# Altium PCB ZooidReceiverPCB.PcbDoc
Units mm, origin at the board's own origin, x right, y up, seen from the top; angles counter-clockwise.
Board outline 35 x 15 mm, 4 copper layers (Component Side, Power Plane, Ground Plane, Solder Side), stack 1.1 mm thick; 45 components, 37 nets, 189 pads, 88 vias.
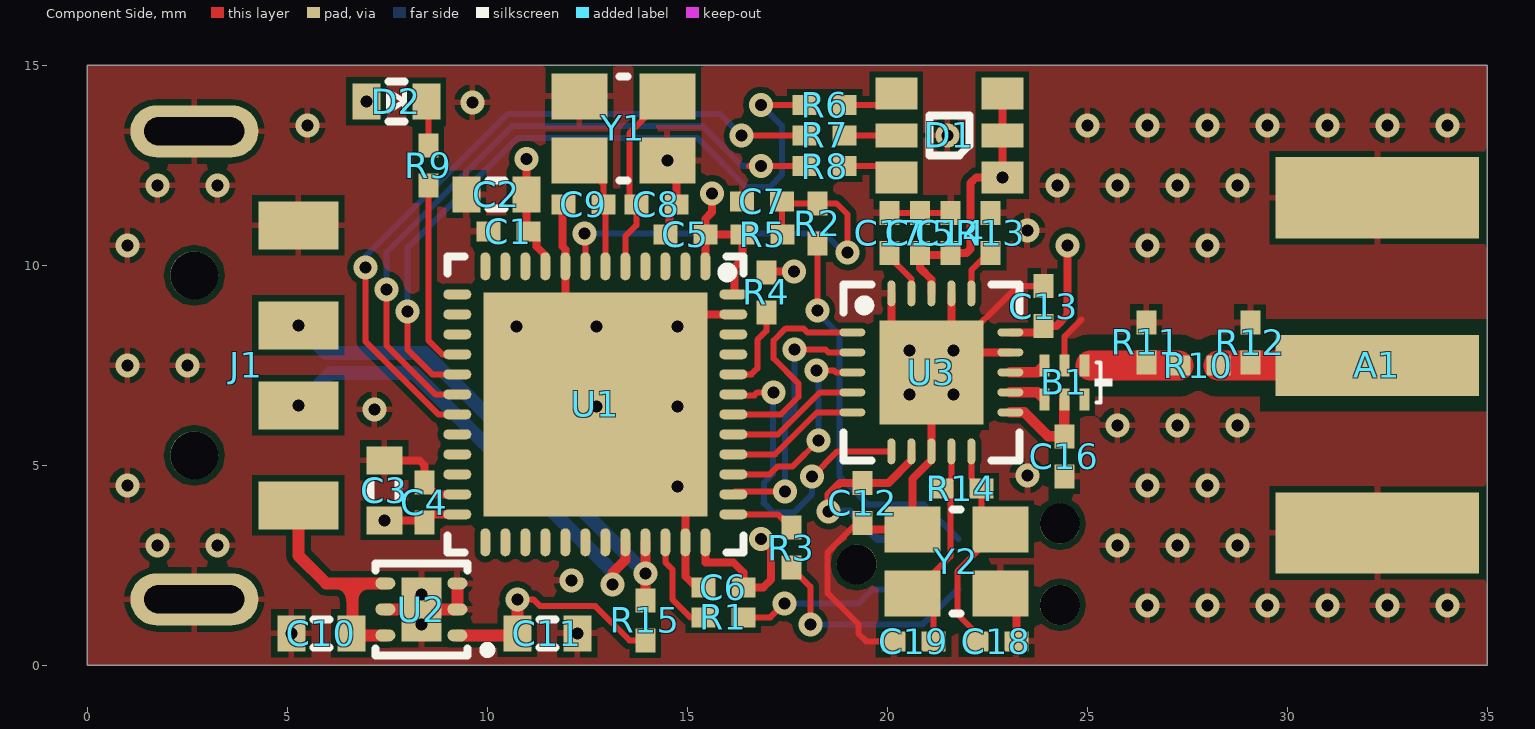
[diagram p0: Component Side view]
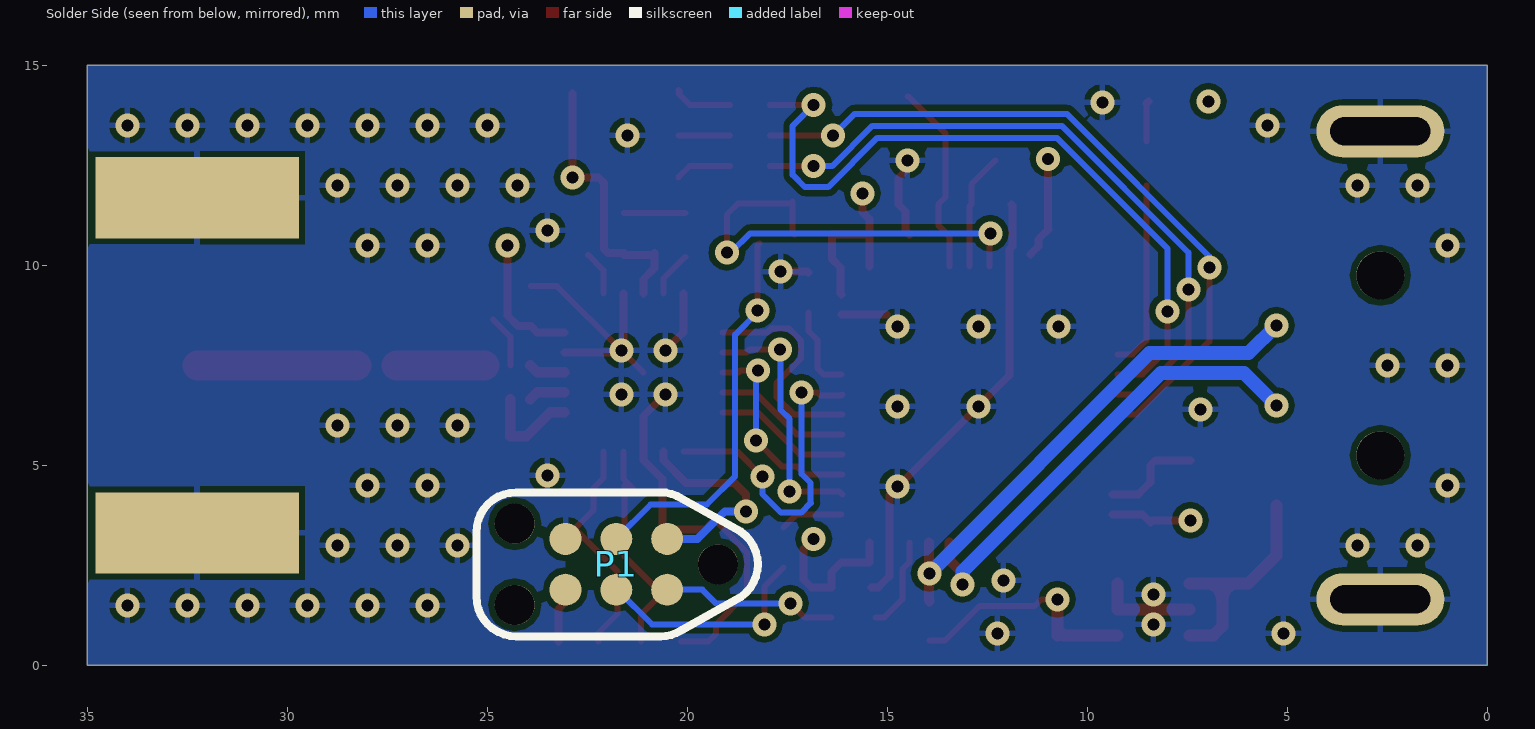
[diagram p1: Solder Side view, seen from below]
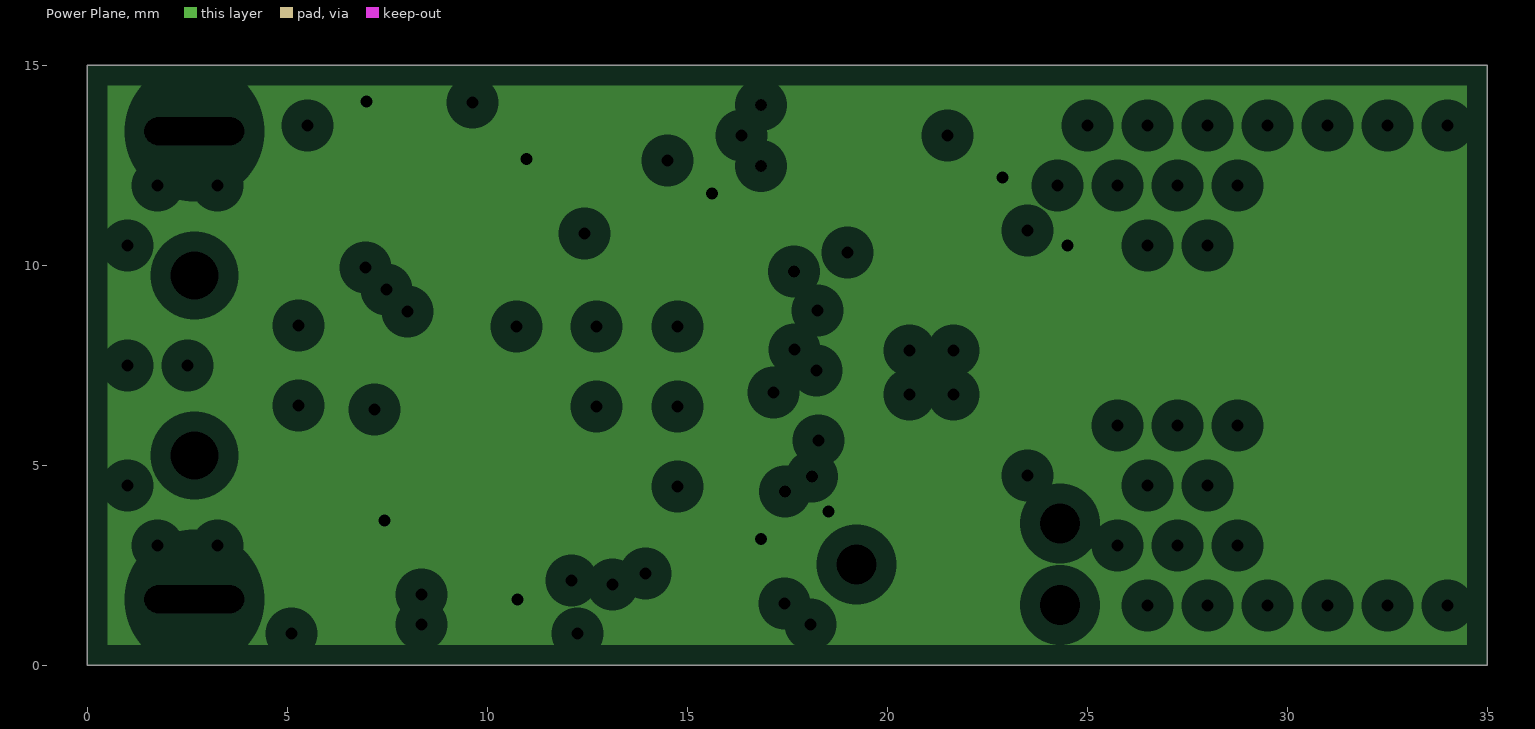
[diagram p2: Power Plane, clearances drawn from the general rule]
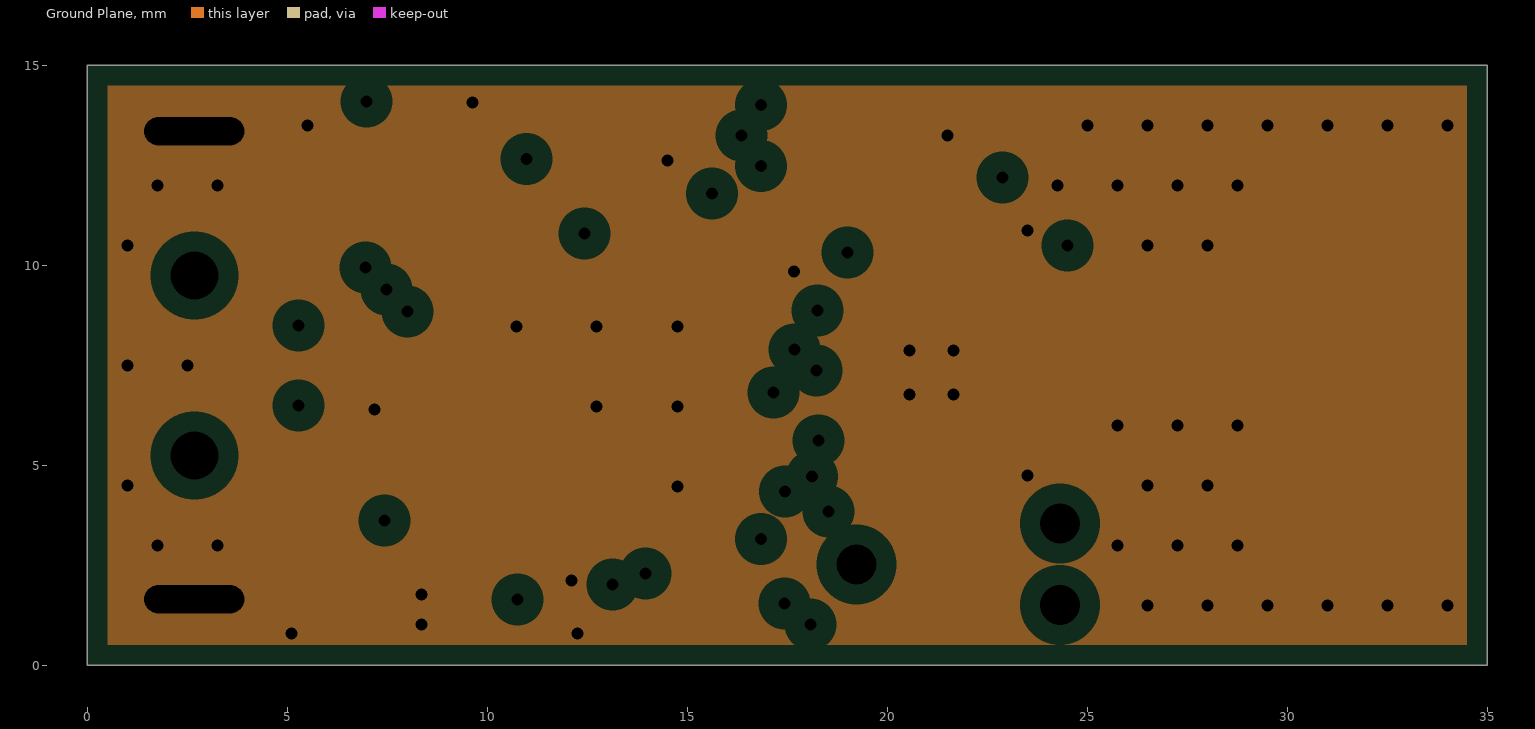
[diagram p3: Ground Plane, clearances drawn from the general rule]

## Layer stack, top to bottom
Component Side: signal copper 0.035
Dielectric 1: prepreg 0.3, FR-4, Dk 4.2
Power Plane: plane copper 0.035, net +3.3V
Dielectric 3: prepreg 0.36, FR-4, Dk 4.2
Ground Plane: plane copper 0.035, net GND
Dielectric 4: prepreg 0.3, FR-4, Dk 4.2
Solder Side: signal copper 0.035

## Board outline
0,0 0,15 35,15 35,0

## Design rules (kind name [scope] priority, off if disabled: settings)
Clearance Clearance_Antenna [InNet('NetA1_1') Or InNet('NetB1_1') vs isRegion] p1: gap=0.4
Clearance Clearance_1 [All] p2: gap=0.15
ComponentClearance [All] p1: gap=0.15 collisioncheckmode=3 verticalgap=0.254 showdistances=FALSE
DiffPairsRouting DiffPairsRouting_USB [InNetClass('USB')] p1: maxlimit=0.254 minlimit=0.15 mostfreqgap=0.254 toplayer_mingap=0.254 toplayer_minwidth=0.2 toplayer_maxwidth=0.3 toplayer_prefwidth=0.381 bottomlayer_maxgap=0.17 bottomlayer_prefgap=0.15 bottomlayer_minwidth=0.2 bottomlayer_maxwidth=0.54 bottomlayer_prefwidth=0.35 maxuncoupledlength=12.7
DiffPairsRouting [All] p2: maxlimit=10 minlimit=0.15 mostfreqgap=0.2 toplayer_minwidth=0.15 toplayer_maxwidth=0.6 toplayer_prefwidth=0.2 bottomlayer_minwidth=0.15 bottomlayer_maxwidth=0.6 bottomlayer_prefwidth=0.2 maxuncoupledlength=12.7
FabricationTestPointUsage FabricationTestPointUsage_1 [All] p1: valid=0 allowmultiple=FALSE
FabricationTestpoint FabricationTestpoint_1 [All] p1: side=3 testpointundercomponent=TRUE minsize=1.016 maxsize=2.54 preferedsize=1.524 minholesize=0 maxholesize=1.016 preferedholesize=0.813 testpointgrid=0.025 allowsidetop=TRUE allowsidebottom=TRUE usegrid=TRUE gridtolerance=0
HoleSize [All] p1: absolutevalues=TRUE maxlimit=6 minlimit=0.2 maxpercent=80.000 minpercent=20.000
HoleSize FabricationTestpoint [All] p2 off: absolutevalues=TRUE maxlimit=2.54 minlimit=0.025 maxpercent=80.000 minpercent=20.000
HoleSize FabricationTestPointUsage [All] p3 off: absolutevalues=TRUE maxlimit=2.54 minlimit=0.025 maxpercent=80.000 minpercent=20.000
MatchedLengths MatchedLengths_USB [InNetClass('USB')] p1: tolerance=0.15 checknetsindiffpair=TRUE checkdiffpairvsdiffpair=TRUE checkothers=TRUE
MaxMinImpedance [InNetClass('USB')] p1: minimum=89.00 maximum=91.00
MinimumSolderMaskSliver [All] p1: minsoldermaskwidth=0.01
PlaneClearance [All] p1: clearance=0.5
PlaneConnect [All] p1: planeconnectstyle=Relief reliefexpansion=0.4 reliefentries=4 reliefconductorwidth=0.15 reliefairgap=0.15
PolygonConnect [All] p1: connectstyle=Relief reliefconductorwidth=0.15 reliefentries=4 polygonreliefangle="90 Angle" airgapwidth=0.15
RoutingCorners [All] p1: cornerstyle=45-Degree minsetback=1.25 maxsetback=1.25
RoutingVias [All] p1: holewidth=0.3 width=0.6 viastyle="Through Hole" minholewidth=0.3 minwidth=0.6 maxholewidth=0.3 maxwidth=0.6
SilkToBoardRegionClearance [All] p1 off:
SilkToSilkClearance [All] p1: silktosilkclearance=0.1
SilkToSolderMaskClearance [IsPad] p1: minsilkscreentomaskgap=0.1 clearancetoexposedcopper=TRUE
SolderMaskExpansion [All] p1: expansion=0.075
UnpouredPolygon [All] p1: allowunpoured=FALSE
Width Width_USB [InNetClass('USB')] p1: maxlimit=0.107 minlimit=0.098 preferedwidth=0.103 impedancedriven=TRUE minimp=89.000000 maximp=91.000000 favimp=90.000000 checkconnectedcopper=TRUE
Width [All] p2: maxlimit=1 minlimit=0.15 preferedwidth=0.2 minimp=50.000000 maximp=50.000000 favimp=50.000000
17 further rules are at their usual default settings.

## Classes and differential pairs
net class USB: USB_D_N USB_D_P
component class SRMicrocontroller: C1 C2 C3 C4 C5 C6 C7 C8 C9 P1 R1 R2 R3 R4 R5 U1 Y1
component class SRPeripherals: C10 C11 D1 D2 J1 R6 R7 R8 R9 R15 U2
component class SRRadio: A1 B1 C12 C13 C14 C15 C16 C17 C18 C19 R10 R11 R12 R13 R14 U3 Y2
net class RGBLED[1..3]: RGBLED1 RGBLED2 RGBLED3
differential pair USB_D: +USB_D_P -USB_D_N

## Components (designator, comment, footprint, x,y, rotation, side; value= is the part's Value field where it differs from the comment)
A1 "142-4701-801" 142-4701-801 32.25,7.5 r270 top
B1 "2450BM14A0002T" 2450BM14A0002 24.425,7.075 r0 top
C1 "10nF" 0402 10.525,10.85 r0 top
C2 "1uF" 0603 10.225,11.775 r0 top
C3 "4.7uF" 0603 7.425,4.375 r270 top
C4 "100nF" 0402 8.425,4.075 r270 top
C5 "100nF" 0402 14.95,10.775 r0 top
C6 "100nF" 0402 15.9,1.95 r0 top
C7 "100nF" 0402 16.87,11.6 r0 top
C8 "22pF" 0402 14.225,11.525 r180 top
C9 "22pF" 0402 12.4,11.525 r0 top
C10 "1uF" 0603 5.85,0.8 r0 top
C11 "1uF" 0603 11.5,0.8 r180 top
C12 "100nF" 0402 19.38,4.06 r90 top
C13 "100nF" 0402 23.91,8.98 r270 top
C14 "10nF" 0402 21.58,10.81 r270 top
C15 "1nF" 0402 20.82,10.81 r270 top
C16 "2.2nF" 0402 24.425,5.225 r90 top
C17 "33nF" 0402 20.05,10.81 r270 top
C18 "22pF" 0402 22.725,0.6 r180 top
C19 "22pF" 0402 20.66,0.6 r0 top
D1 "SMLVN6RGB1W1" "3.5x2.8 mm 6-SMD" 21.55,13.25 r180 top
D2 "BLUE LED" "0603 - LED" 7.725,14.1 r0 top
J1 "48037-2200" 48037-2200 5.275,7.5 r270 top locked
P1 "TC2030-IDC-NL" TC2030-IDC-NL 21.775,2.525 r0 bottom
R1 "22R" 0402 15.9,1.2 r0 top
R2 "22R" 0402 18.25,11.05 r270 top
R3 "22R" 0402 17.6,2.94 r270 top
R4 "100K" 0402 16.975,9.325 r270 top
R5 "100K" 0402 16.88,10.77 r180 top
R6 "22.6R" 0402 18.43,14.01 r0 top
R7 "130R" 0402 18.43,13.25 r0 top
R8 "24.9R" 0402 18.43,12.48 r0 top
R9 "22R" 0402 8.525,12.5 r90 top
R10 "0R" 0402 27.775,7.5 r0 top
R11 "0402-NC" "0402 - NOBODY" 26.475,8.075 r270 top
R12 "0402-NC" "0402 - NOBODY" 29.075,8.075 r270 top
R13 "22K 0402 1/16W ±1%" 0402 22.58,10.81 r270 top
R14 "1M" 0402 21.85,4.42 r180 top
R15 "1.5K" 0402 13.95,1.125 r270 top
U1 "STM32F103CBU6" QFN50P700X700X60_HS-49L 12.7,6.525 r270 top
U2 "ADP122ACPZ-3.3-R7" "LFCSP-6 2.0X2.0X0.55" 8.35,1.4 r90 top
U3 "nRF24L01+" QFN50P400X400X95_HS-21L 21.1,7.325 r0 top
Y1 "7V-16.000MAAE-T" "3.2x2.5 CRYSTAL" 13.4,13.425 r180 top
Y2 "7V-16.000MAAE-T" "3.2x2.5 CRYSTAL" 21.725,2.6 r0 top

## Footprints (in the part's own frame and the unit in brackets; to place one, negate y for a bottom-side part, rotate by r counter-clockwise, add the part's x,y. Pads: shape width x height; smd on the part's side, far side on the other; paste and mask are expansions set on the pad)
"3.2x2.5 CRYSTAL" [mm]
  rect 1.4x1.15 smd: 1(-1.1,-0.8) 2(1.1,-0.8) 3(1.1,0.8) 4(-1.1,0.8)
  silkscreen extent -0.1,-1.3 0.1,1.3, body extent -1.6,-1.25 1.6,1.25, height 0.8
"3.5x2.8 mm 6-SMD" [mm] "3.5 x 2.8 mm 6-SMD Flat Leads"
  rect 1.05x0.8 smd: 1(-1.325,1.05) 3(-1.325,-1.05) 4(1.325,-1.05) 6(1.325,1.05)
  rect 1.05x0.6 smd: 2(-1.325,0) 5(1.325,0)
  silkscreen extent -0.5,-0.5 0.5,0.5, body extent -1.75,-1.4 1.75,1.4, height 0.6
142-4701-801 [mil]
  rect 60x200 smd: 1(0,0)
  rect 80x200 smd: 2(-165,0) 2(165,0)
  rect 80x200 smd far side: 2(-165,0) 2(165,0)
  body extent -187,-85 187,477, height 171
0402 [mm] "Chip Body 1.0 x 0.5 mm (LxW typ)"
  rect 0.6x0.5 smd: 1(-0.5,0) 2(0.5,0)
  body extent -0.55,-0.3 0.55,0.3, height 0.55
"0402 - NOBODY" [mm] "Chip Body 1.0 x 0.5 mm (LxW typ)"
  rect 0.6x0.5 smd: 1(-0.5,0) 2(0.5,0)
  body extent -0.55,-0.3 0.55,0.3, height 0
0603 [mm] "Chip Body 1.6 x 0.8 mm (LxW typ)"
  rect 0.7x0.9 smd: 1(-0.75,0) 2(0.75,0)
  silkscreen extent -0.2,-0.35 0.2,0.35, body extent -0.85,-0.48 0.85,0.48, height 0.9
"0603 - LED" [mm] "Chip Body 1.6 x 0.8 mm (LxW typ)"
  rect 0.7x0.9 smd: 1(-0.75,0) 2(0.75,0)
  silkscreen extent -0.2,-0.5 0.2,0.5, body extent -0.85,-0.48 0.85,0.48, height 0.9
2450BM14A0002 [mm] "2.45 GHz Impedance Matched Balun-Filter: Optimized for Nordic's Chipset nRF24L01"
  rect 0.25x0.55 smd: 1(0.5,0.425) 2(0,0.425) 3(-0.5,0.425) 4(-0.5,-0.425) 5(0,-0.425) 6(0.5,-0.425)
  silkscreen extent 0.75,-0.5 1.2,0.5, body extent -0.8,-0.4 0.8,0.4, height 0.6
48037-2200 [mm] "Molex 48037-2200 USB Type A Receptacle"
  rect 1.2x2 smd: 1(3.5,0) 2(1,0) 3(-1,0) 4(-3.5,0)
  oval 1.3x3.2 hole 0.7 slot 2.5 at 90 deg: 5(-5.85,-2.6) 5(5.85,-2.6)
  round 1.2 hole 1.2 paste+0 mask+0: MH1(-2.25,-2.6) MH2(2.25,-2.6)
  body extent -6.02,-20.35 6.03,0.6, height 2.1
"LFCSP-6 2.0X2.0X0.55" [mm] ". 6-Lead Lead Frame Chip Scale Package [LFCSP_UD]  2.00 mm× 2.00 mm Body, Ultra Thin, Dual Lead  (CP-6-3)"
  oval 0.3x0.5 smd: 1(-0.65,-0.9) 2(0,-0.9) 3(0.65,-0.9) 4(0.65,0.9) 5(0,0.9) 6(-0.65,0.9)
  rect 1.6x1 smd: 7(0,0)
  silkscreen extent -1.15,-1.75 1.15,1.15, body extent -1,-1 1,1, height 0.6
QFN50P400X400X95_HS-21L [mm] "QFN, 20-Leads, Body 4,00x4,00mm, Pitch 0,50mm, Thermal Pad 2,60x2,60mm, IPC High Density"
  oval 0.65x0.2 smd: 1(-1.975,1) 2(-1.975,0.5) 3(-1.975,0) 4(-1.975,-0.5) 5(-1.975,-1) 11(1.975,-1) 12(1.975,-0.5) 13(1.975,0) 14(1.975,0.5) 15(1.975,1)
  oval 0.2x0.65 smd: 6(-1,-1.975) 7(-0.5,-1.975) 8(0,-1.975) 9(0.5,-1.975) 10(1,-1.975) 16(1,1.975) 17(0.5,1.975) 18(0,1.975) 19(-0.5,1.975) 20(-1,1.975)
  rect 2.6x2.6 smd: 21(0,0)
  silkscreen extent -2.2,-2.2 2.2,2.2, body extent -2.05,-2.05 2.05,2.05, height 0.95
QFN50P700X700X60_HS-49L [mm] "QFN, 48-Leads, Body 7,00x7,00mm, Pitch 0,50mm, Thermal Pad 5,60x5,60mm, IPC High Density"
  oval 0.7x0.25 smd: 1(-3.45,2.75) 2(-3.45,2.25) 3(-3.45,1.75) 4(-3.45,1.25) 5(-3.45,0.75) 6(-3.45,0.25) 7(-3.45,-0.25) 8(-3.45,-0.75) 9(-3.45,-1.25) 10(-3.45,-1.75) 11(-3.45,-2.25) 12(-3.45,-2.75) 25(3.45,-2.75) 26(3.45,-2.25) 27(3.45,-1.75) 28(3.45,-1.25) 29(3.45,-0.75) 30(3.45,-0.25) 31(3.45,0.25) 32(3.45,0.75) 33(3.45,1.25) 34(3.45,1.75) 35(3.45,2.25) 36(3.45,2.75)
  oval 0.25x0.7 smd: 13(-2.75,-3.45) 14(-2.25,-3.45) 15(-1.75,-3.45) 16(-1.25,-3.45) 17(-0.75,-3.45) 18(-0.25,-3.45) 19(0.25,-3.45) 20(0.75,-3.45) 21(1.25,-3.45) 22(1.75,-3.45) 23(2.25,-3.45) 24(2.75,-3.45) 37(2.75,3.45) 38(2.25,3.45) 39(1.75,3.45) 40(1.25,3.45) 41(0.75,3.45) 42(0.25,3.45) 43(-0.25,3.45) 44(-0.75,3.45) 45(-1.25,3.45) 46(-1.75,3.45) 47(-2.25,3.45) 48(-2.75,3.45)
  rect 5.6x5.6 smd: 49(0,0)
  silkscreen extent -3.7,-3.7 3.7,3.7, body extent -3.55,-3.55 3.55,3.55, height 0.6
TC2030-IDC-NL [mm] "TagConnector TC2030-IDC-NL"
  round 0.8 smd paste-1: 1(-1.27,-0.635) 2(-1.27,0.635) 3(0,-0.635) 4(0,0.635) 5(1.27,-0.635) 6(1.27,0.635)
  round 1 hole 1 unplated mask+0: ""(-2.54,0) ""(2.54,-1.016) ""(2.54,1.016)
  Component Side pour cut-out: -1.27,-0.085 -1.27,0.085 -1.06,0.127 -0.881,0.246 -0.762,0.425 -0.72,0.635 -0.72,0.635 -0.55,0.635 -0.496,0.396 -0.343,0.205 -0.122,0.099 0.122,0.099 0.343,0.205 0.496,0.396 0.55,0.635 0.55,0.635 0.72,0.635 0.762,0.425 0.881,0.246 1.06,0.127 1.27,0.085 1.27,0.085 1.27,-0.085 1.06,-0.127 0.881,-0.246 0.762,-0.425 0.72,-0.635 0.72,-0.635 0.55,-0.635 0.496,-0.396 0.343,-0.205 0.122,-0.099 -0.122,-0.099 -0.343,-0.205 -0.496,-0.396 -0.55,-0.635 -0.55,-0.635 -0.72,-0.635 -0.762,-0.425 -0.881,-0.246 -1.06,-0.127 -1.27,-0.085
  silkscreen extent -3.54,-1.8 3.5,1.8, body extent -1.67,-1.03 1.67,1.03, height 0

## Part data
A1: "JOHNSON  142-4701-801  SMA FEMELLE REVERSE POLARITY TERMINAISON"
B1: "Johanson Technology Impedance Matched Balun Filter Integrated Passive for nRF24L01"
C1 C14: "10nF 0402 X7R 25V ±5%"
C2 C10 C11: "1uF 0603 X5R 10V ±10%"
C3: "4.7uF 0603 X5R 10V ±10%"
C4 C5 C6 C7 C12 C13: "100nF 0402 X7R 16V ±10%"
C8 C9 C18 C19: "22pF 0402 NP0/CG0 50V ±5%"
C15: "1nF 0402 X7R 50V ±10%"
C16: "2.2nF 0402 X7R 50V ±10%"
C17: "33nF 0402 X7R 50V ±10%"
D1: "ROHM SMLVN6RGB1W1 LED Tri-Color Blue/Green/Red Chip LED 6-Pin 1411 T/RLED Tri-Color Blue/Green/Red Chip LED 6-Pin 1411"
D2: "BRIGHT BLUE LED 20mA"
J1: "Molex USB 2.0 Connector Plug USB Type A"
P1: "TagConnect TC2030-IDC-NL SWD Programming Connector"
R1 R2 R3 R9: "22R 0402 1/16W ±1%"
R4 R5: "100K 0402 1/16W ±1%"
R6: "22.6R 0402 1/16W ±0.05R"
R7: "130R 0402 1/16W ±0.05R"
R8: "24.9R 0402 1/16W ±0.05R"
R10: "0R 0402 1/16W ±0.05R"
R11 R12: "NOT CONNECTED"
R13: library part 22K
R14: "1M 0402 1/16W ±1%"
R15: "1.5K 0402 1/16W ±1%"
U1: "STMICROELECTRONICS  STM32F103CBU6 ARM Cortex-M3, 72 MHz, 128 KB, 20 KB, 48, VFQFPN"
U2: "Analog Devices ADP122ACPZ-3.3-R7 - 5.5 V Input, 300 mA, Low Quiescent  Current, CMOS Linear Regulator"
U3: "Nordic Semi Ultra low power 2.4GHz RF Transceiver IC"
Y1 Y2: "TXC - 7V-16.000MAAE-T, 16MHZ, 30PPM, 12PF - CRYSTAL"

## Via types
v1: diameter 0.6, hole 0.3, Component Side to Solder Side, tented both sides, 88 vias

## Nets (pads, with @x,y where several pads share a name; then routed paths per layer and width w, separated by ;. In a path a pad name is that pad's centre, name@x,y a point inside that pad or via, vN(x,y) a via of type N, cw(c..) or ccw(c..) an arc to the next point about the centre after c; other vN are vias at no path point)
+3.3V: C1.2 C2.2 C3.2 C4.2 C5.2 C6.2 C11.2 C12.2 C13.2 C14.2 C15.2 D1.1 D1.2 D1.3 D2.1 P1.1 R5.2 R15.2 U1.1 U1.9 U1.24 U1.36 U1.48 U2.1 U3.7 U3.15 U3.18 | length 34.7
  Component Side w0.15: v1@10.65,1.65 v1(10.75,1.65) 11.15,1.65 11.321,1.479 12.7,1.479 13.554,0.625 R15.2
  Component Side w0.2: v1(7.425,3.625) 8.375,3.625 C4.2 8.625,3.775 U1.24@9.375,3.775 ; v1(10.98,12.66) 10.98,10.905 10.975,10.9 C1.2 11.225,10.65 11.225,10.475 U1.9@11.425,10.275 ; U1.36 15.45,2.575 16.15,2.575 16.4,2.325 C6.2 16.9,1.95 17.09,2.14 17.09,2.91 v1(16.84,3.16) ; U1.1 C5.2 ; v1(15.62,11.8) 15.62,11.33 15.45,11.16 C5.2 ; U1.48 16.175,9.3 16.175,9.95 16.38,10.155 R5.2 ; R5.2@16.325,10.775 C5.2 ; v1(18.53,3.85) 18.53,4.27 18.82,4.56 C12.2 20.03,4.56 20.6,5.13 U3.7 ; C15.2@20.82,10.08 C15.2@20.82,10.26 ; C15.2 C15.2@20.82,10.26 ; U3.18 21.1,9.65 20.82,9.93 C15.2@20.82,10.26 ; C14.2@21.58,10.26 C15.2@20.82,10.26 ; C14.2 21.98,10.31 22.08,10.41 22.08,12.055 22.225,12.2 v1(22.875,12.2) D1.2 D1.3 ; U3.15 23.755,8.325 C13.2 24.23,8.48 24.5,8.75 v1(24.5,10.5)
  Component Side w0.3: U2.1 10.6,0.75 C11.2@10.65,0.8 ; v1@10.65,1.65 10.75,1.55 C11.2
  Solder Side w0.2: v1(18.53,3.85) 19.06,3.85 19.75,3.16 P1.1
  other v1: 6.975,14.1
ANT1: B1.4 U3.12 | length 0.9
  Component Side w0.254: U3.12 23.75,6.825 B1.4
ANT2: B1.3 U3.13 | length 0.9
  Component Side w0.254: U3.13 23.75,7.325 B1.3
GND: A1.2 B1.2 C1.1 C2.1 C3.1 C4.1 C5.1 C6.1 C7.1 C8.1 C9.1 C10.1 C11.1 C12.1 C13.1 C14.1 C15.1 C16.1 C17.1 C18.1 C19.1 J1.4 J1.5 P1.5 R4.1 R11.1 R12.1 R13.1 U1.8 U1.23 U1.35 U1.47 U1.49 U2.2 U2.3 U2.5 U2.7 U3.8 U3.14 U3.17 U3.20 U3.21 Y1.2 Y1.4 Y2.2 Y2.4 | length 42.6
  Component Side w0.15: C12.1 19.245,3.56 18.51,2.825 18.51,1.8 19.28,1.03 19.28,0.79 19.47,0.6 C19.1 ; C17.1 C15.1 C14.1 ; C13.1 23.26,9.48 U3.21@21.652,7.872 ; B1.2 24.425,8.215 24.86,8.65 ; U3.21@21.652,7.872 21.105,7.325 U3.21 21.647,7.872 U3.21@21.652,7.872
  Component Side w0.2: C3.1 8.3,5.125 8.425,5 C4.1 8.725,4.275 U1.23@9.375,4.275 ; C9.1 11.875,11.5 11.875,10.475 11.95,10.4 11.95,7.25 14.95,4.25 U1.35 14.95,2.225 15.225,1.95 C6.1 ; C5.1 14.55,10.875 14.55,11.35 C8.1 14.725,12.176 Y1.4@14.475,12.426 ; U1.49@15.025,8.775 U1.47 ; R4.1 16.99,9.84 v1(17.67,9.84) ; C12.1 19.54,3.4 Y2.4 20.625,4.655 21.1,5.13 U3.8 21.1,6.225 v1(20.55,6.775) ; U3.20 20.1,8.325 v1(20.55,7.875) ; U3.17 21.6,7.925 v1(21.65,7.875) ; U3.21@21.652,7.872 21.7,7.825 U3.14 ; Y2.2 23.225,1.4 C18.1
  Component Side w0.3: U2.5 U2.7 U2.2 U2.3
  other v1: 5.1,0.8 12.25,0.8 8.35,1.025 26.5,1.5 28,1.5 29.5,1.5 31,1.5 32.5,1.5 34,1.5 8.35,1.775 12.1,2.125 1.75,3 3.25,3 25.75,3 27.25,3 28.75,3 14.75,4.475 1,4.5 26.5,4.5 28,4.5 23.5,4.75 25.75,6 27.25,6 28.75,6 7.175,6.4 12.725,6.475 14.75,6.475 21.65,6.775 1,7.5 2.5,7.5 10.725,8.475 12.725,8.475 14.75,8.475 1,10.5 26.5,10.5 28,10.5 23.5,10.875 1.75,12 3.25,12 24.25,12 25.75,12 27.25,12 28.75,12 14.5,12.625 21.5,13.25 5.5,13.5 25,13.5 26.5,13.5 28,13.5 29.5,13.5 31,13.5 32.5,13.5 34,13.5 9.625,14.075
MCU_X1_16MHZ: C8.2 U1.5 Y1.1 | length 4.8
  Component Side w0.15: U1.5 13.45,10.725 13.725,11 C8.2 13.55,11.7 13.55,13.3 14.475,14.225 Y1.1
MCU_X2_16MHZ: C9.2 U1.6 Y1.3 | length 2.9
  Component Side w0.15: Y1.3 12.9,12.025 C9.2 12.95,11.475 U1.6
NetA1_1: A1.1 R10.2 R12.2 | length 4
  Component Side w0.75: R10.2 A1.1
NetB1_1: B1.1 R10.1 R11.2 | length 2.2
  Component Side w0.75: 25.075,7.5 R10.1
NetC17_2: C17.2 U3.19 | length 1.1
  Component Side w0.15: C17.2@20.05,10.21 20.6,9.66 U3.19
NetD1_4: D1.4 R6.2 | length 1.5
  Component Side w0.15: R6.2 19.935,14.01 D1.4 ; D1.4@20.185,14.34 D1.4@20.225,14.38
NetD1_5: D1.5 R7.2 | length 1.3
  Component Side w0.15: R7.2 D1.5
NetD1_6: D1.6 R8.2 | length 1.4
  Component Side w0.15: R8.2 19.945,12.48 D1.6
NetD2_2: D2.2 R9.2 | length 1
  Component Side w0.15: R9.2@8.525,13.1 D2.2@8.525,14.05
  Component Side w0.2: D2.2 D2.2@8.525,14.05
NetP1_2: P1.2 R1.2 | length 4.4
  Component Side w0.15: R1.2 17.075,1.2 v1(17.425,1.55)
  Solder Side w0.15: v1(17.425,1.55) 19.285,1.55 19.625,1.89 P1.2
NetP1_3: P1.3 R2.2 | length 9.7
  Component Side w0.15: R2.2@18.2,10.55 18.25,10.5 v1(18.25,8.87)
  Solder Side w0.15: v1(18.25,8.87) 18.25,8.82 18.805,8.265 18.805,4.725 19.51,4.02 20.915,4.02 P1.3
NetP1_4: P1.4 R3.2 | length 5.7
  Component Side w0.15: R3.2 18.075,1.965 v1(18.075,1.025)
  Solder Side w0.15: v1(18.075,1.025) 20.883,1.025 21.748,1.89 P1.4
NetR4_2: R4.2 U1.44 | length 2.2
  Component Side w0.15: U1.44 16.6,7.275 16.75,7.425 16.75,8.137 16.975,8.362 R4.2
NetR13_2: R13.2 U3.16 | length 1.1
  Component Side w0.15: U3.16 22.1,9.88 R13.2@22.48,10.26
NRST: C7.2 R2.1 R5.1 U1.7 | length 11.2
  Component Side w0.15: v1(12.425,10.8) 12.45,10.775 U1.7 ; R5.1@17.325,10.775 17.37,10.82 C7.2@17.37,11.555 ; C7.2 C7.2@17.37,11.555 ; v1(19.01,10.32) 19.01,11.27 18.73,11.55 18.2,11.55 17.375,11.55 C7.2@17.37,11.555
  Solder Side w0.15: v1(12.425,10.8) 18.43,10.8 18.91,10.32 v1(19.01,10.32)
RADIO_SPI.CE: U1.42 U3.1 | length 5.6
  Component Side w0.15: U1.42@16.125,6.275 17.342,6.275 17.776,6.709 17.776,7.052 17.155,7.673 17.155,8.117 17.462,8.425 17.903,8.425 18.003,8.325 U3.1
RADIO_SPI.CSN: U1.38 U3.2 | length 6.5
  Component Side w0.15: U1.38@16.125,4.275 16.19,4.34 v1(17.44,4.34) ; v1(17.68,7.9) 18.449,7.9 18.474,7.875 18.525,7.825 U3.2
  Solder Side w0.15: v1(17.44,4.34) 17.44,6.16 17.675,6.395 17.675,7.855 17.7,7.88 v1(17.68,7.9)
RADIO_SPI.IRQ: U1.43 U3.6 | length 8.1
  Component Side w0.15: U1.43@16.125,6.775 16.15,6.75 16.675,6.75 16.75,6.825 ; 16.751,6.825 v1(17.15,6.825) ; v1(18.122,4.719) 18.752,5.35 U3.6
  Solder Side w0.15: v1(17.15,6.825) 17.14,6.815 17.14,4.782 16.915,4.557 16.915,4.065 16.91,4.06 17.155,3.815 17.657,3.815 18.122,4.279 v1(18.122,4.719)
RADIO_SPI.MISO: U1.40 U3.5 | length 3.4
  Component Side w0.15: U1.40@16.125,5.275 U1.40 17.192,5.275 18.242,6.325 U3.5
RADIO_SPI.MOSI: U1.41 U3.4 | length 3.4
  Component Side w0.15: U1.41@16.125,5.775 17.267,5.775 18.317,6.825 U3.4
RADIO_SPI.SCK: U1.39 U3.3 | length 5.2
  Component Side w0.15: U1.39@16.125,4.775 17.06,4.775 17.26,4.975 17.635,4.975 v1(18.28,5.62) ; v1(18.23,7.37) 18.67,7.37 18.715,7.325 U3.3
  Solder Side w0.15: v1(18.23,7.37) 18.205,7.37 18.28,7.295 v1(18.28,5.62)
RADIO_X1_16MHZ: C18.2 R14.1 U3.10 Y2.3 | length 5.7
  Component Side w0.15: U3.10 22.1,4.68 R14.1@22.35,4.43 ; C18.2 22.225,0.807 21.75,1.282 21.75,2.35 22.8,3.4 Y2.3 22.35,3.875 R14.1@22.35,4.43 ; R14.1@22.36,4.42 R14.1@22.35,4.43
RADIO_X2_16MHZ: C19.2 R14.2 U3.9 Y2.1 | length 5.7
  Component Side w0.15: C19.2 21.16,1.265 Y2.1 20.65,1.8 21.575,2.725 21.575,4.5 R14.2@21.44,4.5 ; R14.2@21.36,4.42 R14.2@21.44,4.5 ; U3.9 21.6,4.66 R14.2@21.44,4.5
RGBLED1: R7.1 U1.19 | length 18
  Component Side w0.15: v1(6.95,9.95) 6.95,8.101 8.776,6.275 U1.19 ; v1@16.19,13.24 v1(16.36,13.24) ; v1@16.36,13.25 R7.1
  Solder Side w0.15: v1(6.95,9.95) 6.95,10.221 10.514,13.785 15.815,13.785 v1(16.36,13.24)
RGBLED2: R6.1 U1.17 | length 18.2
  Component Side w0.15: v1(8,8.85) 8,7.9 8.625,7.275 U1.17 ; v1(16.84,14.01) R6.1
  Solder Side w0.15: v1(8,8.85) 8,10.422 10.763,13.185 15.248,13.185 16.478,11.955 17.057,11.955 17.365,12.263 17.365,13.485 v1(16.84,14.01)
RGBLED3: R8.1 U1.18 | length 17.4
  Component Side w0.15: v1(7.475,9.4) 7.475,8.001 8.701,6.775 U1.18 ; v1(16.84,12.48) 16.54,12.48 R8.1
  Solder Side w0.15: v1(7.475,9.4) 7.475,10.322 10.638,13.485 15.372,13.485 16.377,12.48 v1(16.84,12.48)
STATUS_LED: R9.1 U1.16 | length 4.7
  Component Side w0.15: R9.1 8.525,8.125 8.875,7.775 U1.16
SWCLK: R3.1 U1.37 | length 1.6
  Component Side w0.15: U1.37 17.265,3.775 R3.1
SWDIO: R1.1 U1.34 | length 2.4
  Component Side w0.15: U1.34 14.45,2.855 14.45,2.575 14.625,2.4 14.625,1.65 15.075,1.2 R1.1@15.3,1.2
USB_D_N: J1.2 U1.32 | length 11.7
  Component Side w0.25: v1(13.125,2.025) 13.125,2.31 13.45,2.635 U1.32
  Solder Side w0.35: v1(5.275,6.5) 6.082,7.308 8.162,7.308 13.125,2.345 v1(13.125,2.025)
USB_D_P: J1.3 R15.1 U1.33 | length 12.7
  Component Side w0.25: R15.1@13.95,1.6 R15.1 13.954,1.629 U1.33@13.954,3.075
  Solder Side w0.35: v1(5.275,8.5) 5.968,7.808 8.442,7.808 v1(13.95,2.3)
VDD_PA: B1.5 C16.2 U3.11 | length 2.5
  Component Side w0.254: U3.11 23.425,6.325 24.025,5.725 C16.2 B1.5
VUSB: C10.2 J1.1 U2.4 U2.6 | length 5.7
  Component Side w0.3: J1.1 5.275,2.745 5.97,2.05 6.625,2.05 ; U2.6 6.85,0.75 6.625,0.975 6.625,2.05 ; U2.4 6.625,2.05
pads on no net: B1.6 J1.MH1 J1.MH2 P1. P1.6 U1.2 U1.3 U1.4 U1.10 U1.11 U1.12 U1.13 U1.14 U1.15 U1.20 U1.21 U1.22 U1.25 U1.26 U1.27 U1.28 U1.29 U1.30 U1.31 U1.45 U1.46

## Polygon pours and split planes (outlines as drawn)
GND on Component Side "Top Ground Plance" (solid, pour order 4): 0,15 35,15 35,0 0,0
GND on Solder Side "Bottom Ground Plance" (solid, pour order 3): 0,15 35,15 35,0 0,0
+3.3V on Power Plane (split plane): 34.49,0.51 0.51,0.51 0.51,14.49 34.49,14.49
GND on Ground Plane (split plane): 34.49,0.51 0.51,0.51 0.51,14.49 34.49,14.49

## Other copper
Power Plane (plane layer: these items are gaps in the copper):
  pour cut-out: 20.55,7.875 21.65,7.875 21.65,6.775 20.55,6.775

## Silkscreen, mask and mechanical layers (free items; w line width, h text height)
Board Outline:
  lines w0.2: 0,-0.025 35,-0.025 35,15 0,15 0,-0.025

## Text inside footprints (layer, text, board x,y; h text height)
A1: Mechanical 1 "PCB edge" at 35.552,11.818 h0.6 r270
J1: Mechanical 1 "PCB edge" at -0.875,13.325 h0.6 r270